# Allegro board AC_DC_VRM1.brd
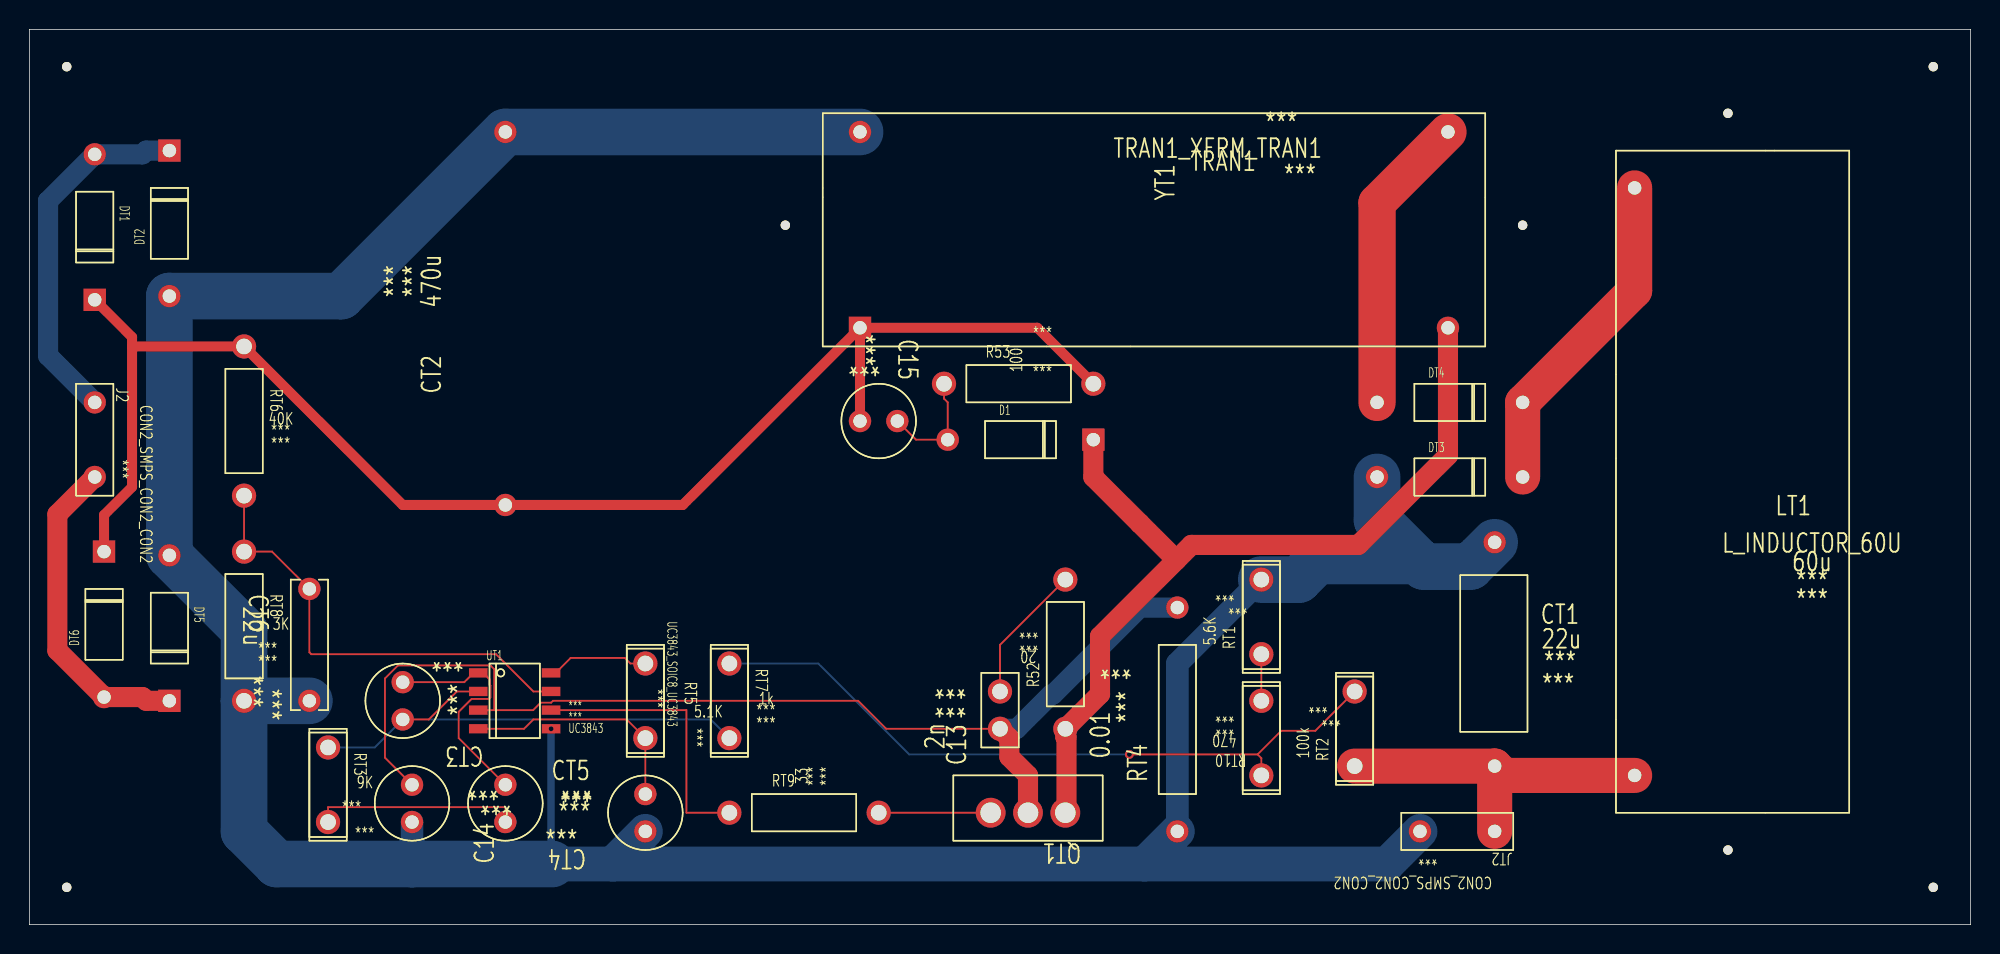
[diagram p0: board, top side]
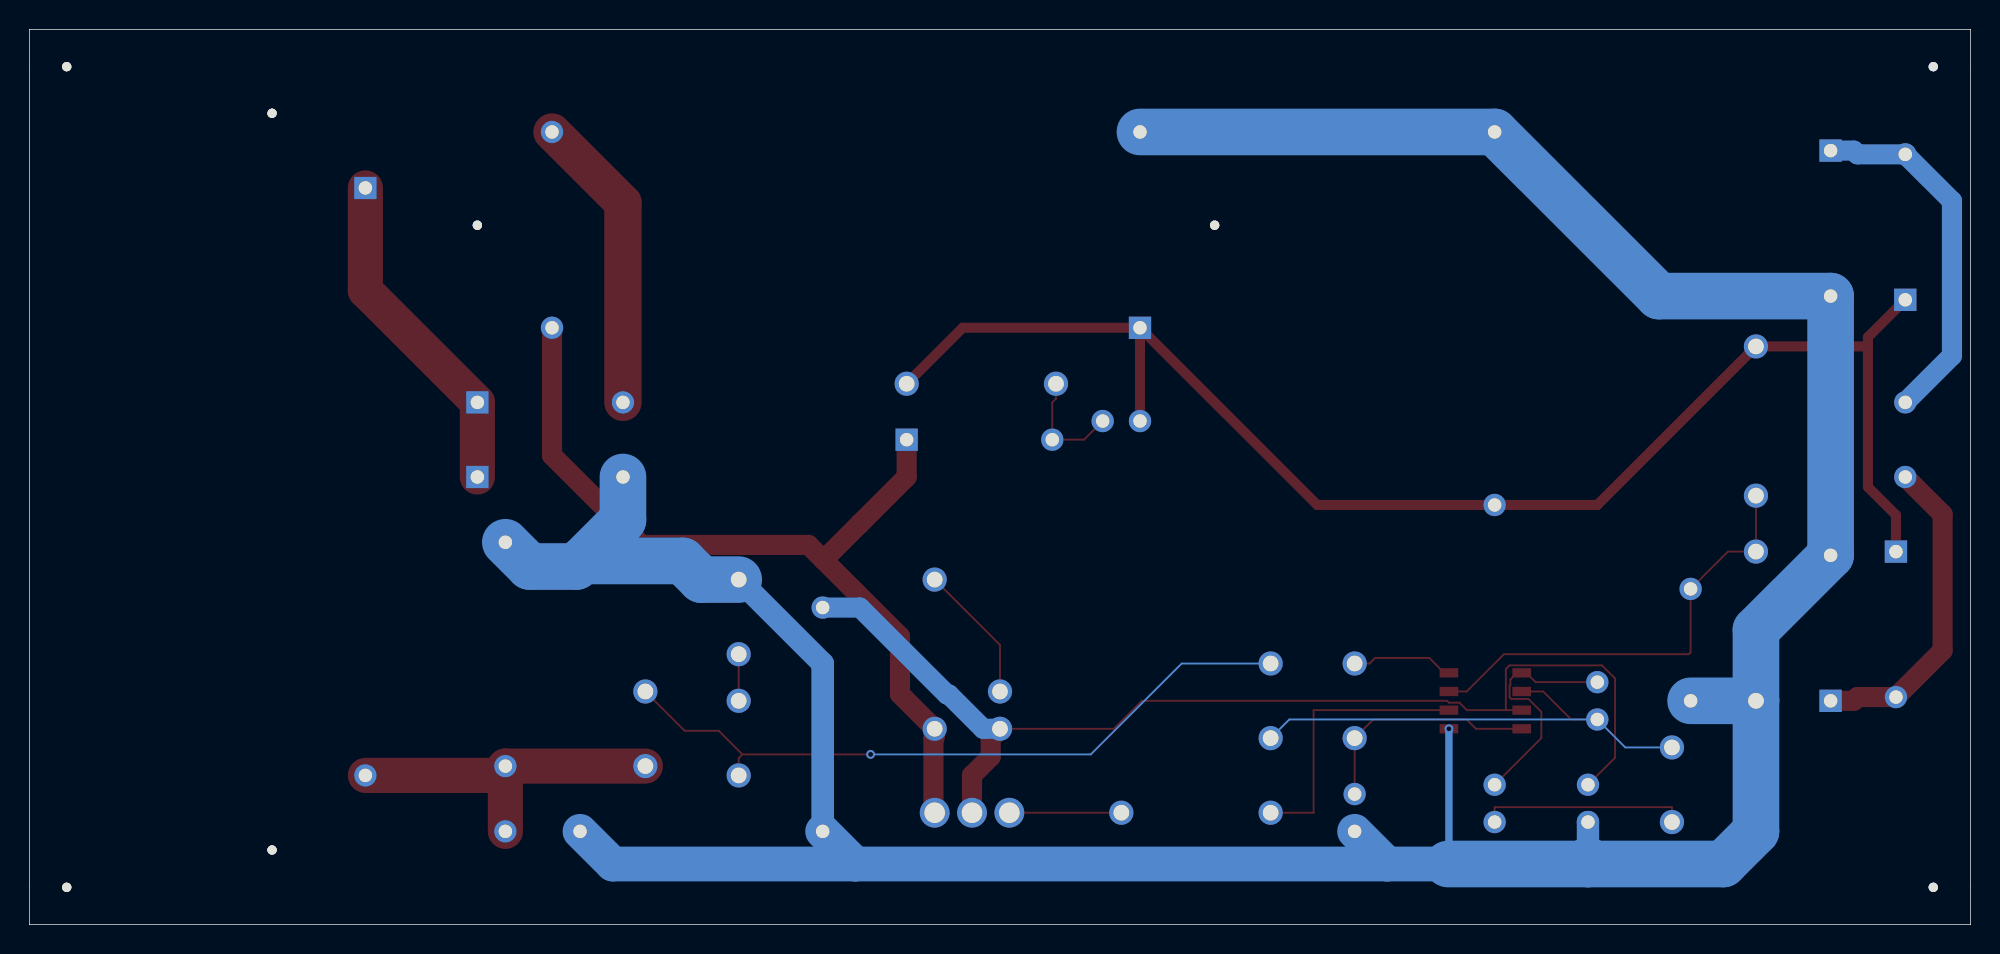
[diagram p1: board, bottom side, seen from below]

Outline 132.08 x 60.96 mm; copper layers: TOP, BOTTOM. Coordinates in mm from the lower left corner of the outline.
Outline path: 0,60.96 0,0 132.08,0 132.08,60.96 0,60.96

## Design rules (mm)
nets with their own width: min track width 0.685; nets N10871839
nets with their own width: min track width 2.54; nets N10909862

## Placement (name value [footprint] x y rotation side)
C13  2n  [CAPCK05]  66.04 15.88 180 top
C14  2n  [CAP196]  26.04 9.53 180 top
C15  33n  [CAP196]  56.51 34.29 270 top
CT1  22u  [CAP600]  99.69 10.8 0 top
CT2  470u  [CAP1000]  32.38 28.57 90 top
CT3  245p  [CAP196]  25.4 16.51 180 top
CT4  15n  [CAP196]  32.38 9.53 180 top
CT5  2.2n  [CAP196]  41.91 6.35 0 top
CT6  22u  [CAP300]  19.05 22.86 270 top
D1  MUR130  [DO41]  72.39 33.02 90 top
DT1  UT4060  [DO41]  4.44 42.55 0 top
DT2  UT4060  [DO41]  9.52 52.71 180 top
DT3  MUR430  [DO41]  101.6 30.48 90 top
DT4  MUR430  [DO41]  101.6 35.56 90 top
DT5  UT4060  [DO41]  9.52 15.24 0 top
DT6  UT4060  [DO41]  5.08 25.4 180 top
J2  CON2  [SMPS_CON2]  4.44 35.56 270 top
JT2  CON2  [SMPS_CON2]  99.69 6.35 180 top
LT1  60u  [INDUCTOR]  109.22 30.48 0 top
NOREF  -  [unnamed]  115.57 5.08 0 top
NOREF#2  -  [unnamed]  129.54 58.42 0 top
NOREF#3  -  [unnamed]  2.54 58.42 0 top
NOREF#4  -  [unnamed]  101.6 47.62 0 top
NOREF#5  -  [unnamed]  2.54 2.54 0 top
NOREF#6  -  [unnamed]  129.54 2.54 0 top
NOREF#7  -  [unnamed]  115.57 55.25 0 top
NOREF#8  -  [unnamed]  51.44 47.62 0 top
QT1  IRF342  [TO220AB]  65.41 7.62 180 top
R52  20  [RES400]  70.49 23.5 180 top
R53  100  [RES400]  72.39 36.83 90 top
RT1  5.6K  [RES200]  83.82 23.5 180 top
RT2  100k  [RES200]  90.17 15.88 180 top
RT3  9K  [RES200]  20.32 6.99 0 top
RT4  0.01  [RES600]  78.11 8.89 180 top
RT5  5.1K  [RES200]  41.91 12.7 0 top
RT6  40K  [RES400]  14.61 29.21 0 top
RT7  1k  [RES200]  47.62 12.7 0 top
RT8  3K  [RES400]  14.61 15.24 0 top
RT9  33  [RES400]  57.79 7.62 90 top
RT10  470  [RES200]  83.82 15.24 180 top
UT1  UC3843  [SOIC8]  33.02 15.24 0 top
YT1  TRAN1  [XFRM]  76.2 40.64 90 top

## Library data of the parts
C13-C15 CT1-CT6 = C: Tolerance: ***; User Part Number: ***
D1 = MUR130
DT1 DT2 DT5 DT6 = UT4060
DT3 DT4 = MUR430
J2 JT2 = CON2: User Part Number: ***
LT1 = L: User Part Number: ***; Tolerance: ***
QT1 = IRF342
R52 R53 RT1-RT10 = R: Tolerance: ***; User Part Number: ***
UT1 = UC3843: Tolerance: ***; User Part Number: ***
YT1 = TRAN1: User Part Number: ***; Tolerance: ***

## Footprints (pads in the part's own frame, mm; a bottom-side part is the same pattern mirrored in y, then rotated)
CAP196
  round 1.524 hole 0.914: 1(0,0) 2(0,2.54)
CAP300
  round 1.524 hole 0.914: 1(0,0) 2(7.62,0)
CAP600
  round 1.524 hole 0.914: 1(0,0) 2(0,15.24)
CAP1000
  round 1.524 hole 0.914: 1(0,0) 2(25.4,0)
CAPCK05
  round 1.651 hole 1.067: 1(0,0) 2(0,2.54)
DO41
  rect 1.524x1.524 hole 0.914: 1(0,0)
  round 1.524 hole 0.914: 2(0,9.906)
INDUCTOR
  rect 1.524x1.524 hole 0.914: 1(0,19.685)
  round 1.524 hole 0.914: 2(0,-20.32)
RES200
  round 1.651 hole 1.067: 1(0,0) 2(0,5.08)
RES400
  round 1.651 hole 1.067: 1(0,0) 2(0,10.16)
RES600
  round 1.524 hole 0.914: 1(0,-12.7) 2(0,2.54)
SMPS_CON2
  round 1.524 hole 0.914: 1(0,0) 2(5.08,0)
SOIC8
  rect 1.27x0.635 smd: 1(-2.477,1.905) 2(-2.477,0.635) 3(-2.477,-0.635) 4(-2.477,-1.905) 5(2.477,-1.905) 6(2.477,-0.635) 7(2.477,0.635) 8(2.477,1.905)
TO220AB
  round 2.032 hole 1.397: 1(0,0) 2(-2.54,0) 3(-5.08,0)
unnamed
  round 0.635 hole 3.175 unplated: (0,0)
XFRM
  rect 1.524x1.524 hole 0.914: 1(0,19.685)
  round 1.524 hole 0.914: 2(0,-20.32) 3(13.335,-20.32) 4(13.335,19.685)

## Nets
0: C14.2 CT1.2 CT2.2 CT5.1 CT6.2 DT2.2(A) DT3.2(1) DT5.2(A) JT2.2 RT1.1 RT4.2 RT8.1 UT1.5(GND) YT1.4(VS2)
VFB: RT2.1 RT7.2 RT10.2
N10823433: CT5.2 RT5.1 UT1.4(RTCT)
N10823565: DT3.1(2) DT4.1(2) LT1.1
N10823997: CT1.1 JT2.1 LT1.2 RT2.2
N10824463: C13.2 C14.1 QT1.2(S) RT4.1 UT1.3(ISENSE)
N10832905: CT3.2 RT3.2 RT7.1 UT1.2(VFB)
N10833624: RT5.2 UT1.8(VREF)
N10846839: CT3.1 CT4.1 UT1.1(COMP)
N10865580: CT4.2 RT3.1
N10871733: DT1.2(A) DT2.1(C) J2.1
N10871817: DT5.1(C) DT6.2(A) J2.2
N10871839: C15.1 CT2.1 DT1.1(C) DT6.1(C) R53.1 RT6.2 YT1.1(VP1)
N10872580: CT6.1 RT6.1 RT8.2 UT1.7(VCC)
N10878265: RT9.2 UT1.6(DRV)
N10883112: D1.1 QT1.3(D) R52.2 YT1.2(VP2)
N10890530: QT1.1(G) RT9.1
N10909862: DT4.2(1) YT1.3(VS1)
N10953199: RT1.2 RT10.1
N10954784: C15.2 D1.2 R53.2
N109165111: C13.1 R52.1

## Via types
v1: diameter 0.61, hole 0.33, TOP to BOTTOM, 2 vias

## Routing (per net, layer and track width the routed paths; a pad name or vN(x,y) marks a point on that pad's centre or on a via; arc(x,y) is an arc through that point)
0: length 238.5
  BOTTOM w0.51: v1(35.5,13.34) 35.5,4.19 35.56,4.13
  BOTTOM w1.524: C14.2 26.04,4.38
  BOTTOM w1.54: RT4.2 78.11,17.78 RT1.1
  BOTTOM w2.37: 75.88,4.13 92.39,4.13 JT2.2 ; 75.88,4.13 39.69,4.13 ; 75.88,4.13 RT4.2 ; 39.69,4.13 35.56,4.13 ; 39.69,4.13 CT5.1
  BOTTOM w3.175: 94.49,24.77 94.87,24.38 98.04,24.38 CT1.2 ; 94.49,24.77 91.69,27.56 DT3.2 ; 94.49,24.77 87.63,24.77 86.36,23.5 RT1.1 ; CT6.2 RT8.1 ; RT8.1 14.61,20.07 DT5.2 DT2.2 21.21,42.8 32.38,53.98 YT1.4 ; RT8.1 14.61,6.35 16.83,4.13 26.04,4.13 ; 35.56,4.13 26.04,4.13 ; 26.04,4.13 26.04,4.38
VFB: length 48.4
  TOP w0.127: 83.57,11.59 83.82,11.34 RT10.2 ; 83.57,11.59 85.17,13.2 87.49,13.2 RT2.1 ; 83.57,11.59 v1(74.84,11.59)
  BOTTOM w0.127: v1(74.84,11.59) 59.86,11.59 53.67,17.78 RT7.2
N10823433: length 16
  TOP w0.127: UT1.4 33.66,13.34 34.29,13.97 40.64,13.97 RT5.1 CT5.2
N10823565: length 22.8
  TOP w2.39: DT3.1 DT4.1 109.22,43.18 LT1.1
N10823997: length 23.8
  TOP w2.39: LT1.2 100.33,10.16 CT1.1 ; CT1.1 RT2.2 ; CT1.1 JT2.1
N10824463: length 77.2
  TOP w0.127: 66.04,13.34 58.29,13.34 56.39,15.24 35.62,15.24 35.5,15.11 34.78,15.11 34.27,14.61 31.62,14.61 ; C14.1 24.19,11.37 24.19,16.76 25.08,17.65 31.37,17.65 31.62,17.4 31.62,14.61 ; UT1.3 31.62,14.61
  TOP w1.37: 66.04,13.34 66.68,12.7 66.68,11.43 67.94,10.16 67.94,7.62
  BOTTOM w1.37: RT4.1 75.56,21.59 69.65,15.67 69.52,15.67 67.18,13.34 66.04,13.34
N10832905: length 34.6
  TOP w0.127: UT1.2 29.08,15.88 27.18,13.97 CT3.2
  BOTTOM w0.127: RT3.2 23.5,12.06 CT3.2 46.36,13.97 RT7.1
N10833624: length 7
  TOP w0.127: RT5.2 40.89,17.78 40.51,18.16 36.83,18.16 35.81,17.15 UT1.8
N10846839: length 16.5
  TOP w0.127: CT4.1 29.21,12.7 29.21,14.49 30.08,15.37 31.26,15.37 31.37,15.48 31.37,16.27 31.31,16.33 31.31,16.69 30.86,17.15 UT1.1 30.23,17.15 29.59,16.51 CT3.1
N10865580: length 14.1
  TOP w0.127: CT4.2 32.38,8 20.32,8 RT3.1
N10871733: length 24.7
  BOTTOM w1.37: DT2.1 7.95,52.71 7.7,52.45 DT1.2 1.27,49.28 1.27,38.74 J2.1
N10871817: length 21.9
  TOP w1.37: J2.2 1.91,27.94 1.91,18.67 DT6.2 7.7,15.49 7.95,15.24 DT5.1
N10871839: length 101.8
  TOP w0.685: R53.1 68.58,40.64 YT1.1 ; DT6.1 5.08,27.89 6.99,29.8 6.99,39.37 ; C15.1 YT1.1 ; YT1.1 44.45,28.57 CT2.1 25.4,28.57 RT6.2 6.99,39.37 ; 6.99,39.37 6.99,40 DT1.1
N10872580: length 31.2
  TOP w0.127: UT1.7 34.29,15.88 31.75,18.42 19.18,18.42 19.05,18.54 CT6.1 16.51,25.4 RT8.2 RT6.1
N10878265: length 19.1
  TOP w0.127: UT1.6 44.7,14.61 44.7,7.62 RT9.2
N10883112: length 61.1
  TOP w1.37: QT1.3 70.56,7.62 70.56,12.78 70.49,12.78 70.49,13.34 72.85,15.7 72.85,19.63 78.04,24.83 ; 78.04,24.83 79.07,25.86 90.42,25.86 96.52,31.95 YT1.2 ; 78.04,24.83 75.57,27.31 75.56,27.31 72.39,30.48 D1.1
N10890530: length 7.6
  TOP w0.127: QT1.1 RT9.1
N10909862: length 20.4
  TOP w2.54: DT4.2 91.69,49.15 YT1.3
N10953199: length 3.2
  TOP w0.127: RT10.1 RT1.2
N10954784: length 7.9
  TOP w0.127: C15.2 60.32,33.02 D1.2 62.48,35.56 62.23,35.81 R53.2
N109165111: length 9.5
  TOP w0.127: C13.1 66.04,19.05 R52.1
